# EAGLE board BATT_CONNECTOR (EAGLE 9.6.2)
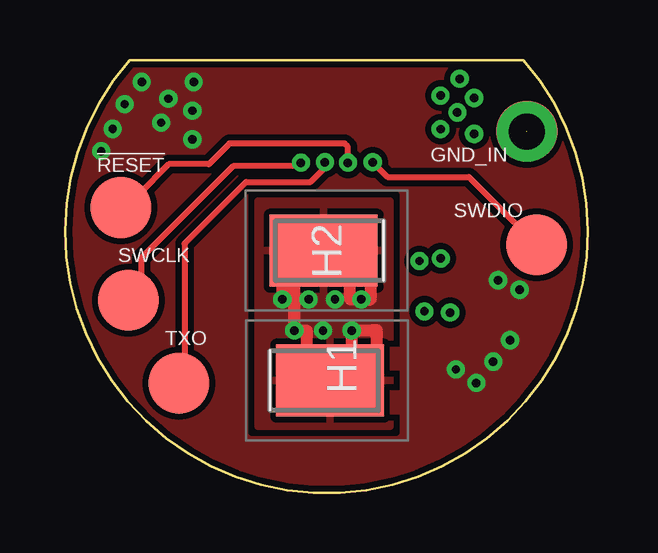
[diagram p0: board, top side]
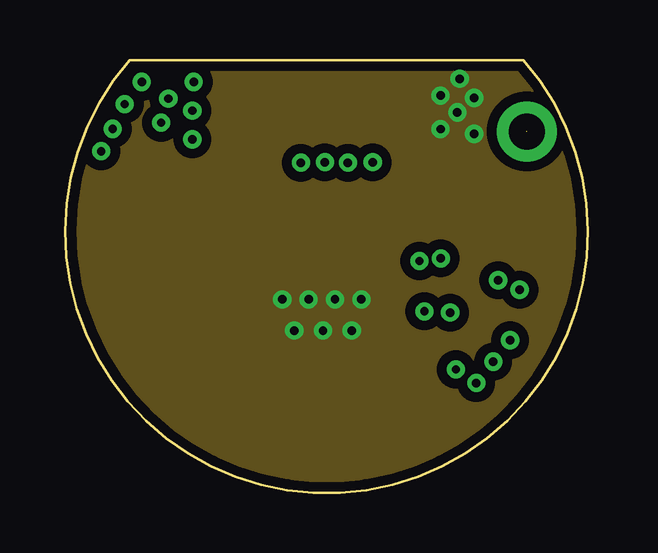
[diagram p1: board, inner layer Route2]
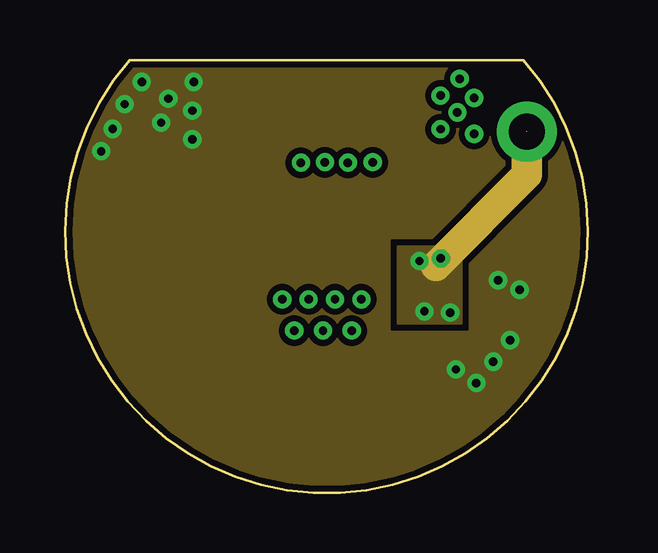
[diagram p2: board, inner layer Route15]
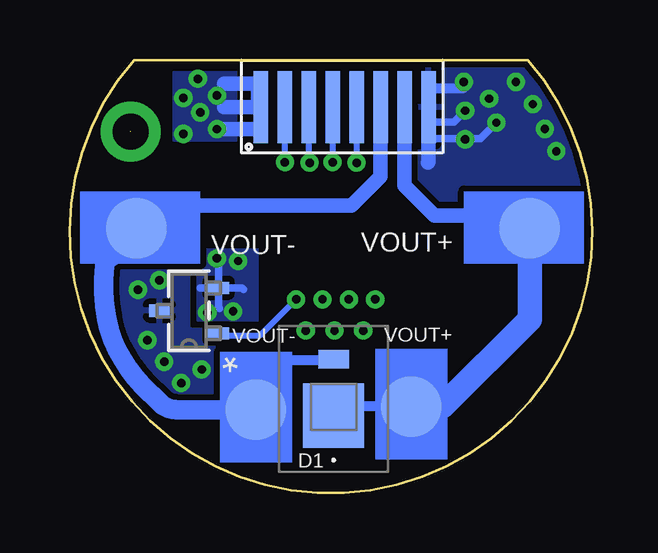
[diagram p3: board, bottom side, seen from below]

Size 21.8 x 18.06 mm. Coordinates in mm from the lower left corner, seen from the top.
Outline: 19.11,18.06 2.69,18.06 arc262 19.11,18.06
Copper layers (1+2*15+16): Top 0.035mm / dielectric 1.5mm / Route2 0.035mm / dielectric 0.15mm / Route15 0.035mm / dielectric 0.2mm / Bottom 0.035mm
Design rules "default *": minimum track width 0.00038125mm, minimum drill 0.35mm, track to track 8mil, track to pad 8mil, pad to pad 8mil, via to via 8mil, smd to smd 5mil, copper to edge 8mil, drill to drill 8mil, minimum pad ring 10mil, minimum via ring 8mil, stop-mask expansion 2mil, vias tented up to drill 50mil, thermal gap 10mil

## Footprints (pad centres in the part's own frame; a part is rotated, then mirrored left to right if it is on the bottom)
B2,54 = smd 2.54 x 2.54: TP 0,0
SM2T18A = smd 2.67 x 2.54: 1 -0.698,0 | smd 0.762 x 1.27: 2 1.653,0
S176142R = smd 3 x 4.5: 1 0,-2
FLEX8 = smd 0.6 x 3: 1 0.8,2.05; 2 1.8,2.05; 3 2.8,2.05; 4 3.8,2.05; 5 4.8,2.05; 7 5.8,2.05; 8 6.8,2.05; 9 7.8,2.05
SOT23_PJA3416_PNJ = smd 0.864 x 0.508: 1 -1.232,0.95; 2 -1.232,-0.95; 3 1.232,0

## Placement (x,y rotation side)
!RESET  TPB2,54  [B2,54]  2.32,11.9 0 top
D1  SM2T18A  [SM2T18A]  10.79,3.92 90 bottom
GND_IN  TPB2,54  [B2,54]  19.25,15.08 0 top
H1  S1761-42R  [S176142R]  13.05,4.69 270 top
H2  S1761-42R  [S176142R]  8.78,10.1 90 top
K1  FLEX8  [FLEX8]  14.63,14.03 0 bottom
Q1  PJA3416AE_R1_00001  [SOT23_PJA3416_PNJ]  16.82,7.6 180 bottom
SWCLK  TPB2,54  [B2,54]  2.63,8.04 0 top
SWDIO  TPB2,54  [B2,54]  19.66,10.34 0 top
TXO  TPB2,54  [B2,54]  4.74,4.57 0 top
VOUT+  TPB2,54  [B2,54]  2.61,11.03 0 bottom
VOUT+1  TPB2,54  [B2,54]  7.55,3.6 0 bottom
VOUT-  TPB2,54  [B2,54]  19.02,11.03 0 bottom
VOUT-1  TPB2,54  [B2,54]  14.03,3.47 0 bottom

## Library data of the parts
!RESET GND_IN SWCLK SWDIO TXO VOUT+ VOUT+1 VOUT- VOUT-1 = testpad
D1 = SM2T18A; DESCRIPTION: 200 W TVS in STmite; HEIGHT: 1.15mm; MANUFACTURER_NAME: STMicroelectronics; MANUFACTURER_PART_NUMBER: SM2T18A; MOUSER_PART_NUMBER: 511-SM2T18A; MOUSER_PRICE-STOCK: https://www.mouser.co.uk/ProductDetail/STMicroelectronics/SM2T18A?qs=9NrABl3fj%2FoQ9e7jVf8sKA%3D%3D
H1 H2 = S1761-42R; DESCRIPTION: EZ_Boardware SMT Spring Contact 3.5mm; HEIGHT: 3.8mm; MANUFACTURER_NAME: Harwin; MANUFACTURER_PART_NUMBER: S1761-42R; MOUSER_PART_NUMBER: 855-S1761-42R; MOUSER_PRICE-STOCK: https://www.mouser.co.uk/ProductDetail/Harwin/S1761-42R?qs=ulE8k0yEMYZkmoaxRCFkSQ%3D%3D
K1 = Flex_3mm
Q1 = PJA3416AE_R1_00001; COPYRIGHT: Copyright (C) 2022 Ultra Librarian. All rights reserved.; DIGI-KEY_PART_NUMBER_1: 3757-PJA3416AE_R1_00001TR-ND; DIGI-KEY_PART_NUMBER_2: 3757-PJA3416AE_R1_00001CT-ND; DIGI-KEY_PART_NUMBER_3: 3757-PJA3416AE_R1_00001DKR-ND; MANUFACTURER_PART_NUMBER: PJA3416AE_R1_00001; MFR_NAME: Panjit

## Nets
!RESET: !RESET.TP K1.3
GND: K1.9 Q1.3
GND_IN: GND_IN.TP Q1.2
SWCLK: K1.5 SWCLK.TP
SWDIO: K1.2 SWDIO.TP
TXO: K1.4 TXO.TP
VBUS: H1.1 H2.1 K1.1 Q1.1
VOUT+: D1.1 K1.8 VOUT+1.TP VOUT+.TP
VOUT-: D1.2 K1.7 VOUT-1.TP VOUT-.TP

## Tracks (layer width: path | path; a pad name or v marks a point on that pad's centre or on a via)
!RESET  (via drill 0.35)
  Top 0.203: !RESET.TP 1.58,11.9 1.58,12.47
  Top 0.254: v11.79,13.77 11.79,14.43 11.65,14.57 6.85,14.57 5.99,13.71 4.32,13.71 3.08,12.47 1.58,12.47
  Bottom 0.203: 11.83,13.81 v11.79,13.77
  Bottom 0.254: K1.3 11.83,13.81
GND  (via drill 0.35)
  Bottom 0.305: v5.3,15.94 5.77,15.47 6.83,15.47 | v4,15.44 4.67,14.77 6.83,14.77
  Bottom 0.406: v5.36,17.14 5.36,16.88 6.83,16.88 K1.9
  Bottom 0.61: K1.9 6.83,15.47 6.83,14.77 6.83,13.79 6.85,13.77
  other vias: 5.3,14.74 4.3,16.44 18.05,8.87 18.95,8.47 17.85,5.47 18.55,6.37 16.29,5.15 17.14,4.58 3.19,17.14 2.48,16.21 1.98,15.18 1.5,14.25
  pour Bottom (isolate 0.254, rank 2): 2.75,18.27 19.25,18.27 20.35,17.17 20.35,-0.53 2.05,-0.53 -1.55,3.07 -1.55,13.97
  pour Top (isolate 0.254, rank 2): 2.7,18.24 19.28,18.24 22.85,14.67 22.85,5.67 16.85,-0.33 3.25,-0.33 -1.05,3.97 -1.05,14.57 2.65,18.27
  pour Bottom (isolate 0.305): 3.35,17.57 3.35,14.27 3.45,14.17 6.85,14.17 6.65,14.37 6.65,17.67 6.55,17.77 3.35,17.77
  pour Route15 (isolate 0.254, rank 2): -2.05,20.57 -2.05,-2.53 24.95,-2.53 24.95,20.57
  pour Bottom (isolate 0.305, rank 3): 17.35,9.17 17.35,6.17 16.95,5.77 16.65,5.47 15.95,5.47 15.95,4.67 16.25,4.37 16.35,4.37 17.35,4.37 17.45,4.37 17.95,4.87 18.45,5.37 18.85,5.77 18.95,5.77 19.55,6.37 19.95,6.77 19.95,7.87 19.95,8.97 19.65,9.27 18.25,9.27 17.45,9.27
GND_IN  (via drill 0.35, 1.5 pad 2.5)  (1 unrouted)
  Top 0.152: GND_IN.TP 18.67,15.08 18.64,15.11
  Route15 0.152: v15.66,9.78 15.55,9.67 v14.77,9.67
  Route15 1.27: v19.25,15.07 19.25,13.27 15.45,9.47
  Bottom 0.305: Q1.2 15.59,9.71 v15.66,9.78 | Q1.2 15.59,7.73 15.55,7.69 | Q1.2 14.61,8.55 14.55,8.49 | Q1.2 16.34,8.55 16.35,8.54
  other vias: 16.05,7.52 14.98,7.57
  pour Bottom (isolate 0.254): 13.95,10.07 13.95,7.17 16.45,7.17 16.45,10.17 13.95,10.17
  pour Route15 (isolate 0.254): 13.85,10.27 13.85,7.07 16.55,7.07 16.55,10.27
SWCLK  (via drill 0.35)
  Top 0.254: SWCLK.TP 3.17,8.58 3.17,9.79 7,13.62 9.68,13.62 v9.83,13.77
  Bottom 0.254: K1.5 v9.83,13.77
SWDIO  (via drill 0.35)
  Top 0.152: 18.72,11.28 19.63,11.28 19.9,11.01 19.9,10.86 19.52,10.48
  Top 0.254: v12.82,13.79 13.44,13.17 16.83,13.17 18.72,11.28 | 19.52,10.48 SWDIO.TP
  Top 0.406: 19.06,10.34 SWDIO.TP
  Bottom 0.203: v12.83,13.8 v12.82,13.79
  Bottom 0.254: K1.2 v12.83,13.8
TXO  (via drill 0.35)
  Top 0.254: TXO.TP 4.97,4.8 4.97,10.39 7.55,12.97 10.23,12.97 10.83,13.57 v10.83,13.79
  Bottom 0.254: K1.4 v10.83,13.79
VBUS  (via drill 0.35)
  Top 0.508: H2.1 9.05,10.1 v9.05,8.07 | 12.98,5.96 12.98,6.79 12.81,6.79 12.81,6.77 v11.95,6.77 11.95,5.83 10.07,5.83 10.07,6.77 v9.55,6.77 9.55,8.84 11.88,8.84 11.88,8.07 v12.35,8.07 12.75,8.07 12.75,8.87
  Bottom 0.254: v12.35,8.07 13.85,6.57 15.54,6.57 Q1.1
  Bottom 0.61: 13.88,15.17 15.35,15.17 | 13.93,16.18 13.93,16.97 14.03,17.07 15.35,17.07 | 15.35,16.08 K1.1
  other vias: 10.15,8.07 11.25,8.07 10.75,6.77 16.45,17.27 15.65,16.57 16.35,15.87 15.65,15.17 17.05,14.97 17.05,16.47
  pour Top: 8.05,12.17 13.55,12.17 13.55,2.77 8.05,2.77
  pour Route2 (isolate 0.406): -3.15,19.77 -3.15,-0.73 22.05,-0.73 22.05,19.77
  pour Bottom: 14.85,17.57 14.85,14.67 17.45,14.67 17.45,17.57
VOUT+
  Bottom 0.406: VOUT+1.TP 10.41,3.6 D1.1
  Bottom 0.61: VOUT+.TP 3.15,11.57 6.59,11.57 7.83,12.81 K1.8
  Bottom 1.016: VOUT+1.TP 6.25,3.6 2.61,7.24 VOUT+.TP
VOUT-
  Bottom 0.152: VOUT-.TP 19.06,11.07 | 19.06,11.07 19.95,11.07 | VOUT-.TP 18.07,11.98 15.44,11.98 | VOUT-.TP 19.06,11.07 | 19.06,11.07 19.95,11.07 | VOUT-.TP 19.06,11.07 | 19.06,11.07 19.95,11.07
  Bottom 0.406: VOUT-1.TP 14.03,5.55 10.81,5.55 D1.2
  Bottom 0.61: K1.7 8.83,13.19 10.04,11.98 17.56,11.98 18.51,11.03 VOUT-.TP
  Bottom 0.813: VOUT-1.TP 17.33,3.47 arc45 18.05,3.77 18.75,4.47 arc34 20.25,7.27 arc32 19.95,11.07
  Bottom 1.016: 20.12,9.93 VOUT-.TP
(copper drawn outside any net)
  shapes: Bottom area x4

## Text on the board
bNames: VOUT+ | VOUT-